# Altium PCB advSymb.PcbDoc
Units mil, origin at the board's own origin, x right, y up, seen from the top; angles counter-clockwise.
Board outline 2657.48 x 2952.76 mil, 2 copper layers (Top Layer, Bottom Layer), stack 65.792 mil thick; 54 components, 47 nets, 118 pads, 0 vias.
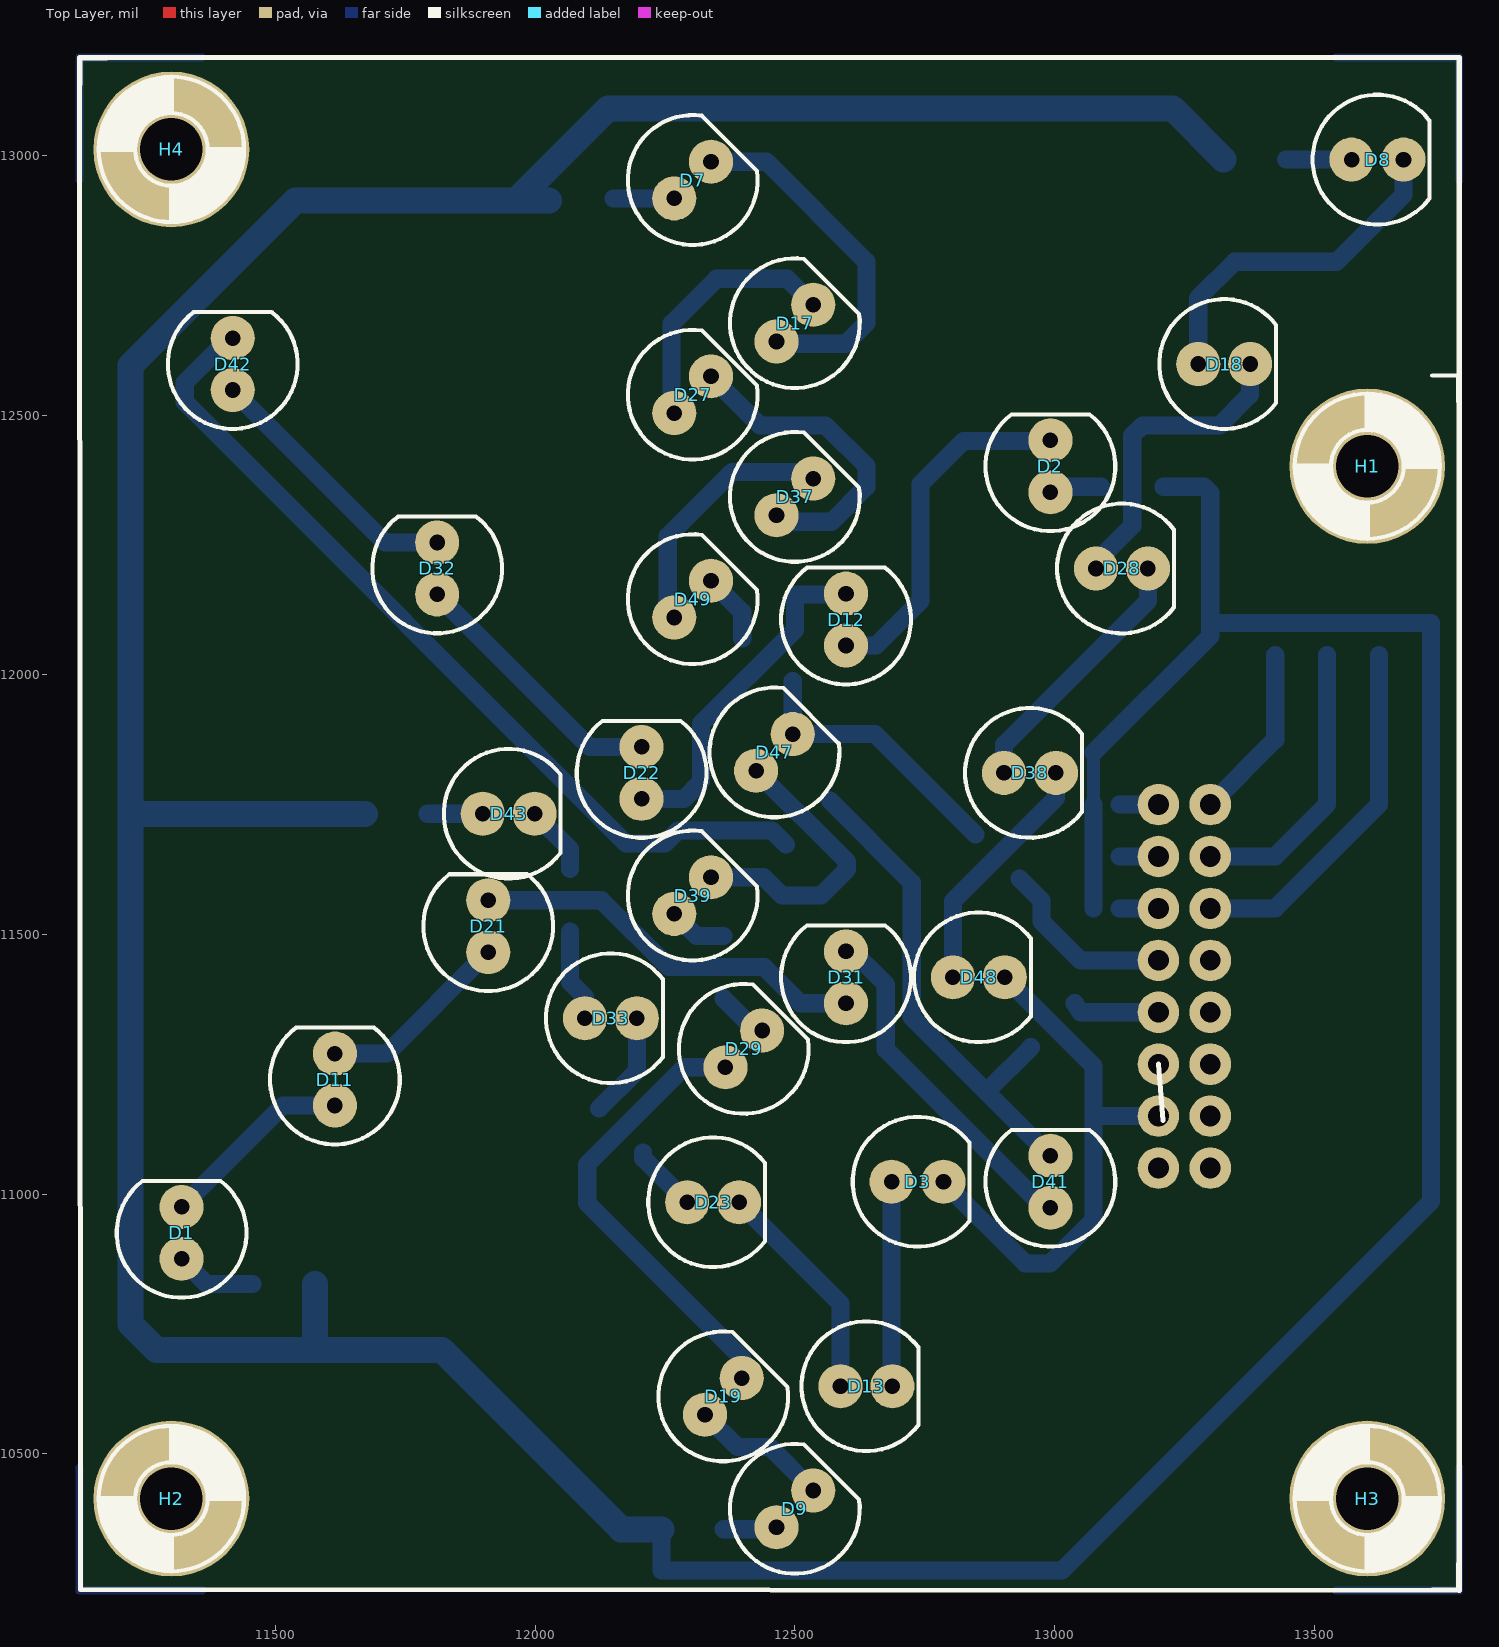
[diagram p0: Top Layer view]
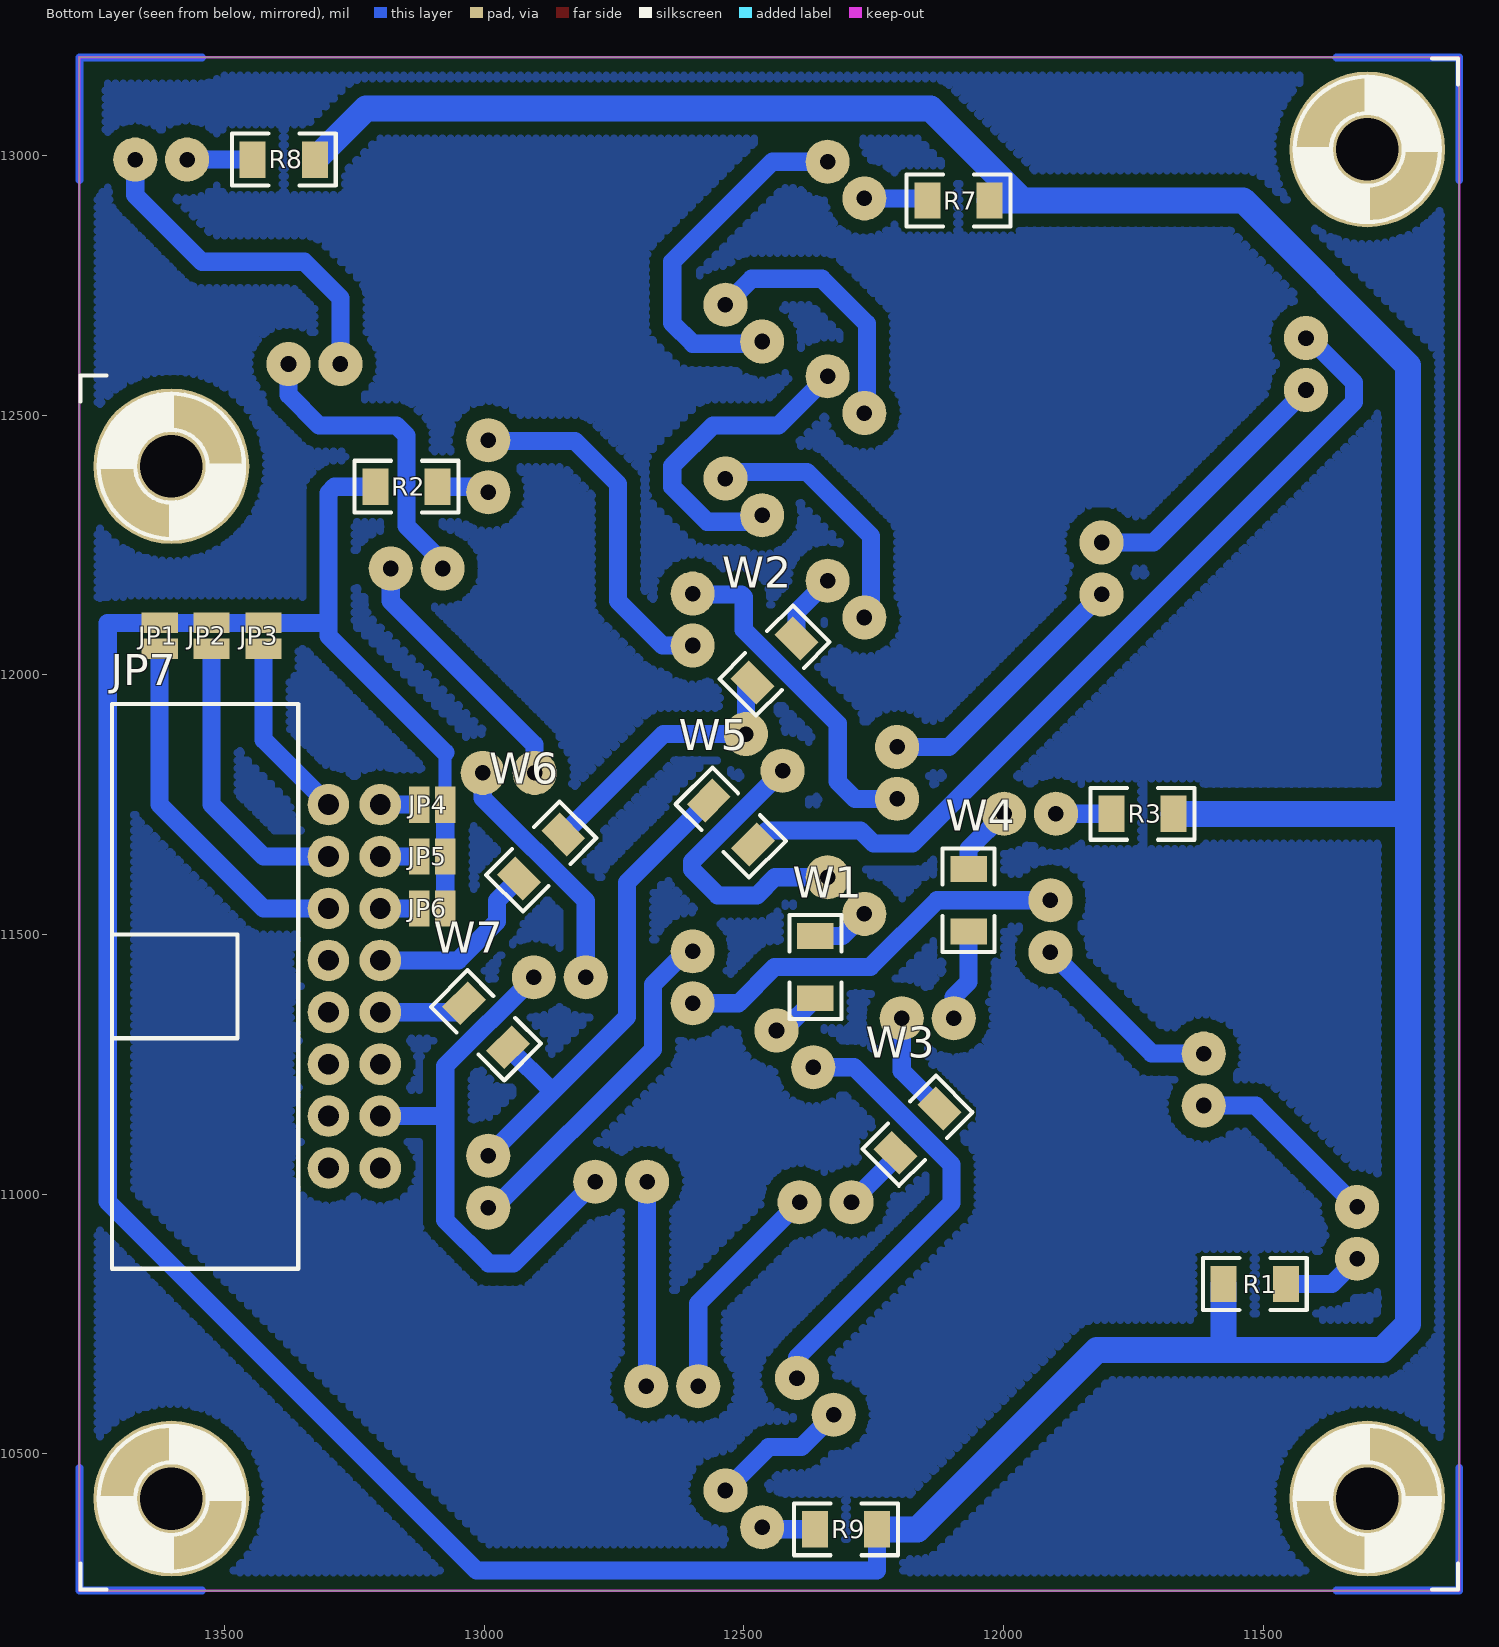
[diagram p1: Bottom Layer view, seen from below]
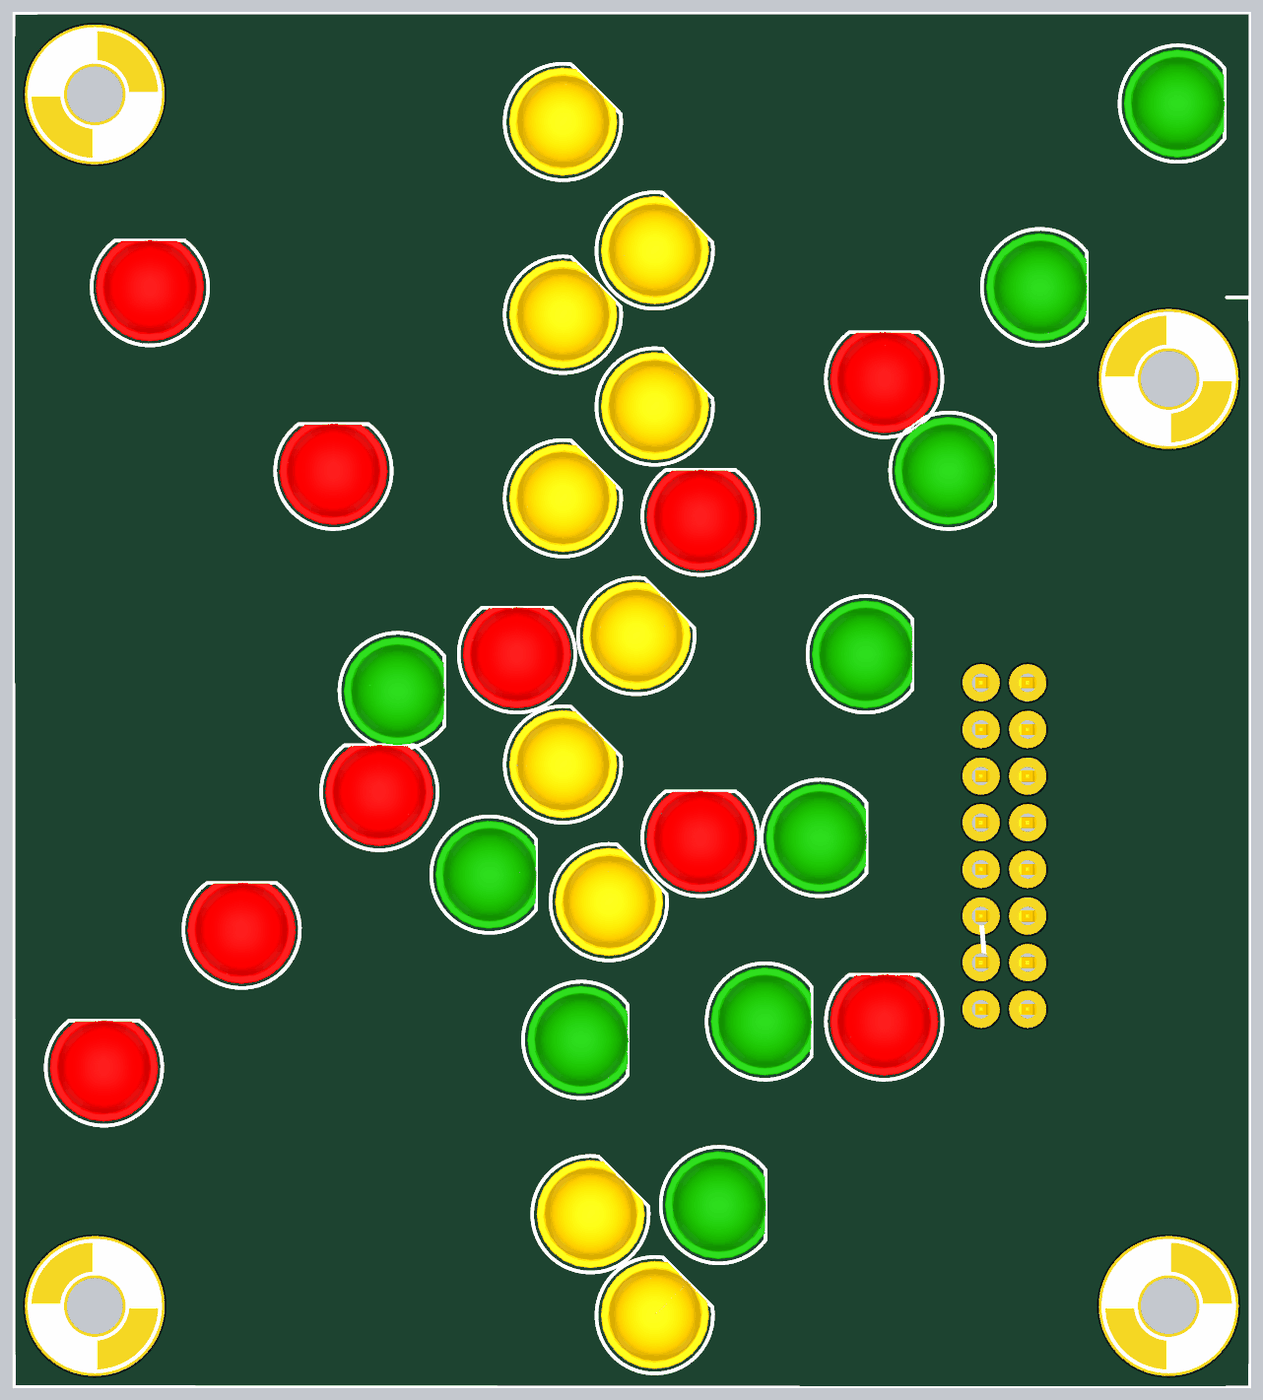
[diagram p2: 3D render of the assembled board from above, using the file's embedded part models]
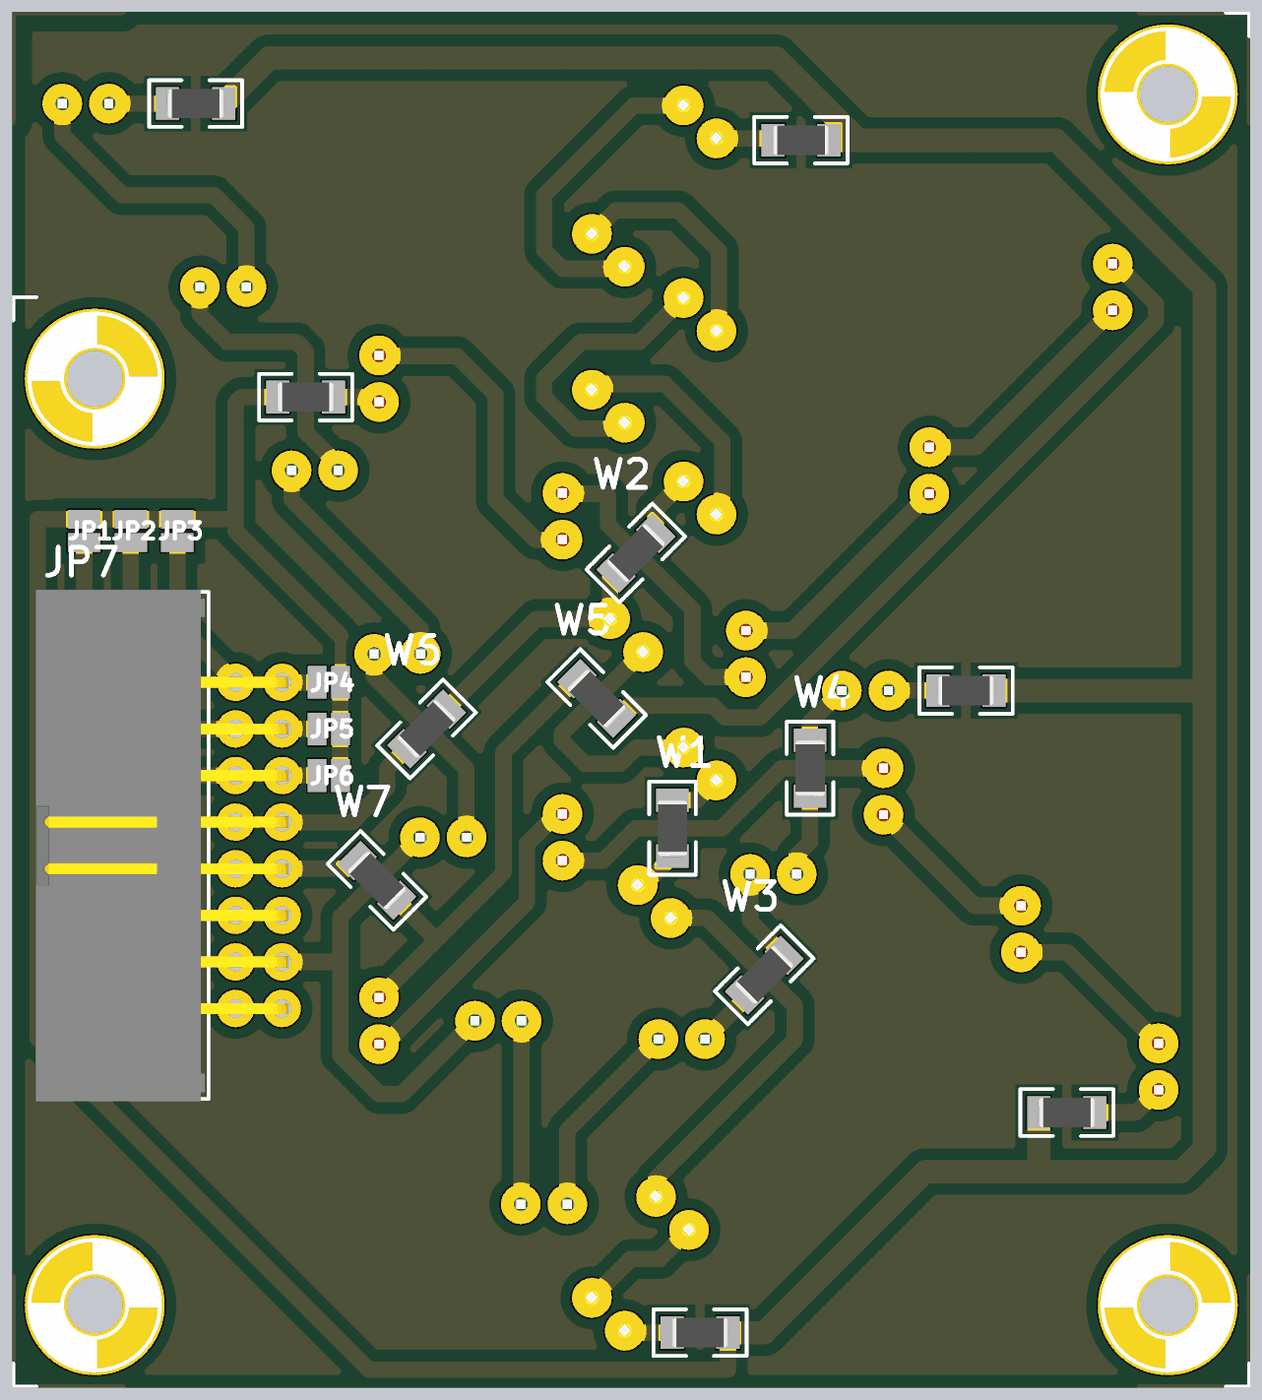
[diagram p3: 3D render of the assembled board from below, using the file's embedded part models]

## Layer stack, top to bottom
Top Layer: signal copper 1.4
Dielectric: core 62.9921, FR-4, Dk 4.8
Bottom Layer: signal copper 1.4

## Board outline
11122.05,10236.22 13779.53,10236.22 13779.53,13188.98 11122.05,13188.98

## Design rules (kind name [scope] priority, off if disabled: settings)
Clearance [All] p1: gap=25
FabricationTestPointUsage TestPointUsage [All] p1: valid=0 allowmultiple=FALSE
FabricationTestpoint Testpoint [All] p1: side=3 testpointundercomponent=TRUE minsize=40 maxsize=100 preferedsize=60 minholesize=0 maxholesize=40 preferedholesize=32 testpointgrid=1 allowsidetop=TRUE allowsidebottom=TRUE usegrid=TRUE gridtolerance=0.01
PolygonConnect [All] p1: connectstyle=Relief reliefconductorwidth=25 reliefentries=4 polygonreliefangle="90 Angle"
RoutingVias [All] p1: holewidth=28 width=50 viastyle="Through Hole" minholewidth=28 minwidth=50 maxholewidth=28 maxwidth=50
SilkscreenOverComponentPads [All] p1: minsilkscreentomaskgap=10
SolderMaskExpansion [All] p1: expansion=4
Width [All] p1: maxlimit=100 minlimit=15 preferedwidth=50
25 further rules are at their usual default settings.

## Components (designator, comment, footprint, x,y, rotation, side; value= is the part's Value field where it differs from the comment)
D1 "LED" "LED5MM ROJO" 11318.9,10925.2 r90 top
D2 "LED" "LED5MM ROJO" 12992.13,12401.57 r90 top
D3 "LED" "LED5MM VERDE" 12736.22,11023.62 r0 top
D7 "LED" "LED5MM YELLOW" 12303.15,12952.76 r45 top
D8 "LED" "LED5MM VERDE" 13622.05,12992.13 r0 top
D9 "LED" "LED5MM YELLOW" 12500,10393.7 r45 top
D11 "LED" "LED5MM ROJO" 11614.17,11220.47 r90 top
D12 "LED" "LED5MM ROJO" 12598.43,12106.3 r90 top
D13 "LED" "LED5MM VERDE" 12637.8,10629.92 r0 top
D17 "LED" "LED5MM YELLOW" 12500,12677.17 r45 top
D18 "LED" "LED5MM VERDE" 13326.77,12598.43 r0 top
D19 "LED" "LED5MM YELLOW" 12362.2,10610.24 r45 top
D21 "LED" "LED5MM ROJO" 11909.45,11515.75 r90 top
D22 "LED" "LED5MM ROJO" 12204.72,11811.02 r90 top
D23 "LED" "LED5MM VERDE" 12342.52,10984.25 r0 top
D27 "LED" "LED5MM YELLOW" 12303.15,12539.37 r45 top
D28 "LED" "LED5MM VERDE" 13129.92,12204.72 r0 top
D29 "LED" "LED5MM YELLOW" 12401.57,11279.53 r45 top
D31 "LED" "LED5MM ROJO" 12598.43,11417.32 r90 top
D32 "LED" "LED5MM ROJO" 11811.02,12204.72 r90 top
D33 "LED" "LED5MM VERDE" 12145.67,11338.58 r0 top
D37 "LED" "LED5MM YELLOW" 12500,12342.52 r45 top
D38 "LED" "LED5MM VERDE" 12952.76,11811.02 r0 top
D39 "LED" "LED5MM YELLOW" 12303.15,11574.8 r45 top
D41 "LED" "LED5MM ROJO" 12992.13,11023.62 r90 top
D42 "LED" "LED5MM ROJO" 11417.32,12598.43 r90 top
D43 "LED" "LED5MM VERDE" 11948.82,11732.28 r0 top
D47 "LED" "LED5MM YELLOW" 12460.63,11850.39 r45 top
D48 "LED" "LED5MM VERDE" 12854.33,11417.32 r0 top
D49 "LED" "LED5MM YELLOW" 12303.15,12145.67 r45 top
H1 "Agujero de montaje" AGUJERO 13602.36,12401.57 r0 top
H2 "Agujero de montaje" AGUJERO 11299.21,10413.39 r180 top
H3 "Agujero de montaje" AGUJERO 13602.36,10413.39 r270 top
H4 "Agujero de montaje" AGUJERO 11299.21,13011.81 r90 top
JP1 "JP" JUMPER2 13625,12050 r90 bottom
JP2 "JP" JUMPER2 13525,12050 r90 bottom
JP3 "JP" JUMPER2 13425,12050 r90 bottom
JP4 "JP" JUMPER2 13125,11750 r180 bottom
JP5 "JP" JUMPER2 13125,11650 r180 bottom
JP6 "JP" JUMPER2 13125,11550 r180 bottom
JP7 "Header8x2" IDC8x2_90 13200,11050 r90 bottom
R1 "Res" r1206 11515.75,10826.77 r0 bottom
R2 "Res" r1206 13149.61,12362.2 r0 bottom
R3 "Res" r1206 11732.28,11732.28 r180 bottom
R7 "Res" r1206 12086.61,12913.39 r180 bottom
R8 "Res" r1206 13385.83,12992.13 r180 bottom
R9 "Res" r1206 12303.15,10354.33 r180 bottom
W1 "CABLE" r1206 12362.2,11437.01 r270 bottom
W2 "CABLE" r1206 12440.94,12027.56 r135 bottom
W3 "CABLE" r1206 12165.35,11122.05 r135 bottom
W4 "CABLE" r1206 12066.93,11565.75 r90 bottom
W5 "CABLE" r1206 12525,11715.31 r225 bottom
W6 "CABLE" r1206 12890.16,11650 r135 bottom
W7 "CABLE" r1206 12996.65,11325 r225 bottom

## Footprints (in the part's own frame and the unit in brackets; to place one, negate y for a bottom-side part, rotate by r counter-clockwise, add the part's x,y. Pads: shape width x height; smd on the part's side, far side on the other; paste and mask are expansions set on the pad)
AGUJERO [mil] "AGUJERO DE MONTAJE"
  round 300 hole 120: 1(0,0)
  silkscreen extent -140,-140 175,175
IDC8x2_90 [mil]
  round 80 hole 40: 1(0,0) 2(0,100) 3(100,0) 4(100,100) 5(200,0) 6(200,100) 7(300,0) 8(300,100) 9(400,0) 10(400,100) 11(500,0) 12(500,100) 13(600,0) 14(600,100) 15(700,0) 16(700,100)
  silkscreen extent -194,158 894,517, body extent -199,-13 899,529, height 358
JUMPER2 [mil]
  rect 40x70 smd: 1(0,0) 2(50,0)
"LED5MM ROJO" [mil] "LED 5MM"
  round 85 hole 30: 1(-50,0) 2(50,0)
  silkscreen extent -125,-125 100,125, body extent -116,-116 99,116, height 339
"LED5MM VERDE" [mil] "LED 5MM"
  round 85 hole 30: 1(-50,0) 2(50,0)
  silkscreen extent -125,-125 100,125, body extent -116,-116 99,116, height 339
"LED5MM YELLOW" [mil] "LED 5MM"
  round 85 hole 30: 1(-50,0) 2(50,0)
  silkscreen extent -125,-125 100,125, body extent -115,-116 100,116, height 339
r1206 [mil]
  rect 50x70 smd: 1(-60,0) 2(60,0)
  silkscreen extent -100,-50 100,50, body extent -63,-31 63,31, height 33

## Part data
D1 D2 D3 D7 D8 D9 D11 D12 D13 D17 D18 D19 D21 D22 D23 D27 D28 D29 D31 D32 D33 D37 D38 D39 D41 D42 D43 D47 D48 D49: "Led"
JP1 JP2 JP3 JP4 JP5 JP6: "Jumper 2 contactos"
JP7: "Header 8x2"
R1 R2 R3 R7 R8 R9: "Resistor"
W1 W2 W3 W4 W5 W6 W7: "Cable"

## Nets (pads, with @x,y where several pads share a name; then routed paths per layer and width w, separated by ;. In a path a pad name is that pad's centre, name@x,y a point inside that pad or via, vN(x,y) a via of type N, cw(c..) or ccw(c..) an arc to the next point about the centre after c; other vN are vias at no path point)
C: D47.2 W2.1 W6.2 | length 533.6
  Bottom Layer w35: W2.1@12495.99,11987.5 D47.2 12654.41,11885.75 W6.2
NetD1_1: D1.1 R1.1 | length 156.9
  Bottom Layer w35: D1.1 11367.32,10826.77 R1.1
NetD1_2: D1.2 D11.1 | length 376.2
  Bottom Layer w35: D1.2 11514.17,11170.47 D11.1
NetD2_1: D2.1 R2.1 | length 101.9
  Bottom Layer w35: D2.1 13002.76,12362.2 R2.1
NetD2_2: D2.2 D12.1 | length 690.2
  Bottom Layer w35: D12.1 12656.3,12056.3 12742.13,12142.13 12742.13,12367.13 12825,12450 12992.13,12450 D2.2
NetD3_1: D3.1 D13.2 | length 392.1
  Bottom Layer w35: D13.2@12686.22,10631.5 D3.1
NetD7_1: D7.1 R7.1 | length 117.2
  Bottom Layer w35: R7.1@12150.63,12917.4 D7.1
NetD7_2: D7.2 D17.1 | length 688.6
  Bottom Layer w35: D7.2 12444.96,12988.11 12637.8,12795.28 12637.8,12677.17 12598.13,12637.5 12468.95,12637.5 D17.1
NetD8_1: D8.1 R8.1 | length 126.2
  Bottom Layer w35: R8.1 D8.1
NetD8_2: D8.2 D18.1 | length 672.7
  Bottom Layer w35: D18.1 13276.77,12725.59 13346.46,12795.28 13543.31,12795.28 13672.05,12924.02 D8.2
NetD9_1: D9.1 R9.1 | length 103.2
  Bottom Layer w35: R9.1 12460.63,10354.33 D9.1
NetD9_2: D9.2 D19.1 | length 268.9
  Bottom Layer w35: D19.1 12389.23,10512.5 12451.91,10512.5 D9.2
NetD11_2: D11.2 D21.1 | length 376.2
  Bottom Layer w35: D11.2 11714.17,11270.47 D21.1
NetD12_2: D12.2 D22.1 | length 660.9
  Bottom Layer w35: D22.1 12286.02,11761.02 12319.19,11794.19 12319.19,11905.81 12500,12086.61 12500,12150 12504.72,12154.72 12598.43,12154.72 D12.2
NetD13_1: D13.1 D23.2 | length 435.2
  Bottom Layer w35: D23.2 12587.8,10788.98 D13.1
NetD17_2: D17.2 D27.1 | length 503.5
  Bottom Layer w35: D27.1 12262.5,12509.31 12262.5,12675.89 12349.11,12762.5 12485.38,12762.5 D17.2
NetD18_2: D18.2 D28.1 | length 591.2
  Bottom Layer w35: D28.1@13079.92,12217.22 13149.61,12286.91 13149.61,12460.63 13169.29,12480.32 13317.82,12480.32 13376.77,12539.27 D18.2
NetD19_2: D19.2 D29.1 | length 838.9
  Bottom Layer w35: D29.1 12287.48,11244.17 12100,11056.69 12100,10982.52 D19.2@12397.56,10684.96
NetD21_2: D21.2 D31.1 | length 771.2
  Bottom Layer w35: D21.2 12127.85,11565.75 12256.59,11437.01 12440.94,11437.01 12510.63,11367.32 D31.1
NetD22_2: D22.2 D32.1 | length 515.4
  Bottom Layer w35: D32.1 12104.72,11861.02 D22.2
NetD23_1: D23.1 W3.1 | length 130.5
  Bottom Layer w35: W3.1 12207.78,11068.99 D23.1
NetD27_2: D27.2 D37.1 | length 624
  Bottom Layer w35: D27.2 12432.92,12480.32 12559.06,12480.32 12637.8,12401.57 12637.8,12362.2 12570.25,12294.66 D37.1@12452.14,12294.66
NetD28_2: D28.2 D38.1 | length 508.5
  Bottom Layer w35: D38.1 12902.76,11865.06 13179.92,12142.22 D28.2
NetD29_2: D29.2 W1.2 | length 100.5
  Bottom Layer w35: W1.2 12424.33,11314.88 D29.2
NetD31_2: D31.2 D41.1 | length 681.8
  Bottom Layer w35: D31.2@12598.43,11479.82 12675,11403.25 12675,11278.25 D41.1@12992.13,10961.12
NetD32_2: D32.2 D42.1 | length 515.4
  Bottom Layer w35: D42.1 11711.02,12254.72 D32.2
NetD33_1: D33.1 W4.1 | length 179.1
  Bottom Layer w35: W4.1 12066.93,11408.07 12095.67,11379.33 D33.1
NetD33_2: D33.2 W3.2 | length 204.2
  Bottom Layer w35: W3.2 12195.67,11237.22 D33.2
NetD37_2: D37.2 D49.1 | length 512.8
  Bottom Layer w35: D49.1@12255.29,12097.81 12255.29,12266.95 12378.72,12390.37 D37.2@12547.86,12390.37
NetD38_2: D38.2 D48.1 | length 475.9
  Bottom Layer w35: D48.1 12804.33,11564.17 13002.76,11762.6 D38.2
NetD39_1: D39.1 W1.1 | length 112
  Bottom Layer w35: D39.1 12310.23,11497.01 W1.1
NetD39_2: D39.2 D47.1 | length 559.2
  Bottom Layer w35: D39.2 12439.84,11610.16 12475,11575 12550,11575 12600,11625 12600,11640.31 D47.1
NetD42_2: D42.2 W5.2 | length 1696.7
  Bottom Layer w35: D42.2 11410.93,12648.43 11325,12562.5 11325,12525 12175,11675 12250,11675 12275,11700 12455.46,11700 W5.2
NetD43_1: D43.1 R3.1 | length 106.5
  Bottom Layer w35: R3.1 D43.1
NetD43_2: D43.2 W4.2 | length 134.7
  Bottom Layer w35: D43.2 12066.93,11664.17 W4.2
NetD49_2: D49.2 W2.2 | length 135.9
  Bottom Layer w35: D49.2 12398.52,12121.01 W2.2
NetJP1_1: JP1.1 JP7.12 | length 695.3
  Bottom Layer w35: JP7.12 13425,11550 13625,11750 JP1.1@13625,12037.5
NetJP2_1: JP2.1 JP7.14 | length 553.9
  Bottom Layer w35: JP7.14 13425,11650 13525,11750 JP2.1@13525,12037.5
NetJP3_1: JP3.1 JP7.16 | length 339.3
  Bottom Layer w35: JP7.16 13425,11875 JP3.1@13425,12037.5
NetJP4_1: JP4.1 JP7.15 | length 75
  Bottom Layer w35: JP4.1 JP7.15
NetJP5_1: JP5.1 JP7.13 | length 75
  Bottom Layer w35: JP5.1 JP7.13
NetJP6_1: JP6.1 JP7.11 | length 75
  Bottom Layer w35: JP6.1 JP7.11
NetJP7_7: JP7.7 W7.1 | length 170.6
  Bottom Layer w35: W7.1 13050,11350 JP7.7
NetJP7_9: JP7.9 W6.1 | length 356.2
  Bottom Layer w35: W6.1 12975,11565.16 12975,11525 13050,11450 JP7.9
V: D3.2 D48.2 JP7.3 | length 1051.8
  Bottom Layer w35: D3.2 12943.7,10866.14 12991.14,10866.14 13075,10950 13075,11246.65 D48.2 ; 13075,11150 JP7.3
VCC: JP1.2 JP2.2 JP3.2 JP4.2 JP5.2 JP6.2 R1.2 R2.2 R3.2 R7.2 R8.2 R9.2 | length 10408.6
  Bottom Layer w25: JP4.2 13075,11850
  Bottom Layer w35: R9.2 12243.15,10275 13014.37,10275 13725,10985.63 13725,12100 JP1.2 JP2.2 JP3.2 13300,12100 ; JP6.2 JP5.2 JP4.2 ; 13075,11850 13300,12075 13300,12100 ; R2.2 13287.8,12362.2 13300,12350 13300,12100
  Bottom Layer w50: R1.2 11575.75,10700 ; R3.2 11220.47,11732.28 ; R7.2 11963.39,12913.39 ; R9.2 12165.35,10354.33 11819.68,10700 11575.75,10700 ; R8.2 13227.4,13090.55 12140.55,13090.55 11963.39,12913.39 ; 11220.47,11732.28 11220.47,12595.47 11538.39,12913.39 11963.39,12913.39 ; 11220.47,11732.28 11220.47,10750 11270.47,10700 11575.75,10700
X: D41.2 W5.1 W7.2 | length 976.8
  Bottom Layer w35: W5.1 12725,11600.17 12725,11340.75 D41.2 ; 12871.65,11200 W7.2
pads on no net: H1.1 H2.1 H3.1 H4.1 JP7.1 JP7.2 JP7.4 JP7.5 JP7.6 JP7.8 JP7.10
copper on no net: | length 1889.8
  Bottom Layer w15: 11122.05,10472.44 11122.05,10236.22 11358.27,10236.22 ; 11122.05,12952.76 11122.05,13188.98 11358.27,13188.98 ; 13543.31,10236.22 13779.53,10236.22 13779.53,10472.44 ; 13543.31,13188.98 13779.53,13188.98 13779.53,12952.76

## Polygon pours and split planes (outlines as drawn)
no net on Bottom Layer "Bottom Layer-No Net" (hatched 90Degree grid 15 track 15, remove dead copper, pour order 3): 13779.53,10236.22 13779.53,13188.98 11122.05,13188.98 11122.05,10236.22 13779.53,10236.22

## Keep-outs
Keep-Out Layer:
  the board outline again, w5

## Silkscreen, mask and mechanical layers (free items; w line width, h text height)
Top Overlay:
  lines w10: 13200,11250 13208.66,11141.73 ; 11122.05,13188.98 13779.53,13188.98 13779.53,10236.22 11124.21,10238.39 11122.05,13188.98

## Dimensions
11122.05,10236.22 to 11122.05,13188.98 on Mechanical 1
11122.05,13188.98 to 13779.53,13188.98 on Mechanical 1